# Altium PCB STM32_PCB.PcbDoc (part 2 of 3)
Units mm, origin at the board's own origin, x right, y up, seen from the top; angles counter-clockwise.
Board outline 112.45 x 84.2 mm, 4 copper layers (Top Layer, Int1 (GND), Int2 (PWR), Bottom Layer), stack 1.479 mm thick; 174 components, 200 nets, 660 pads, 398 vias.
Unrouted connection lines stored in the file: 12.
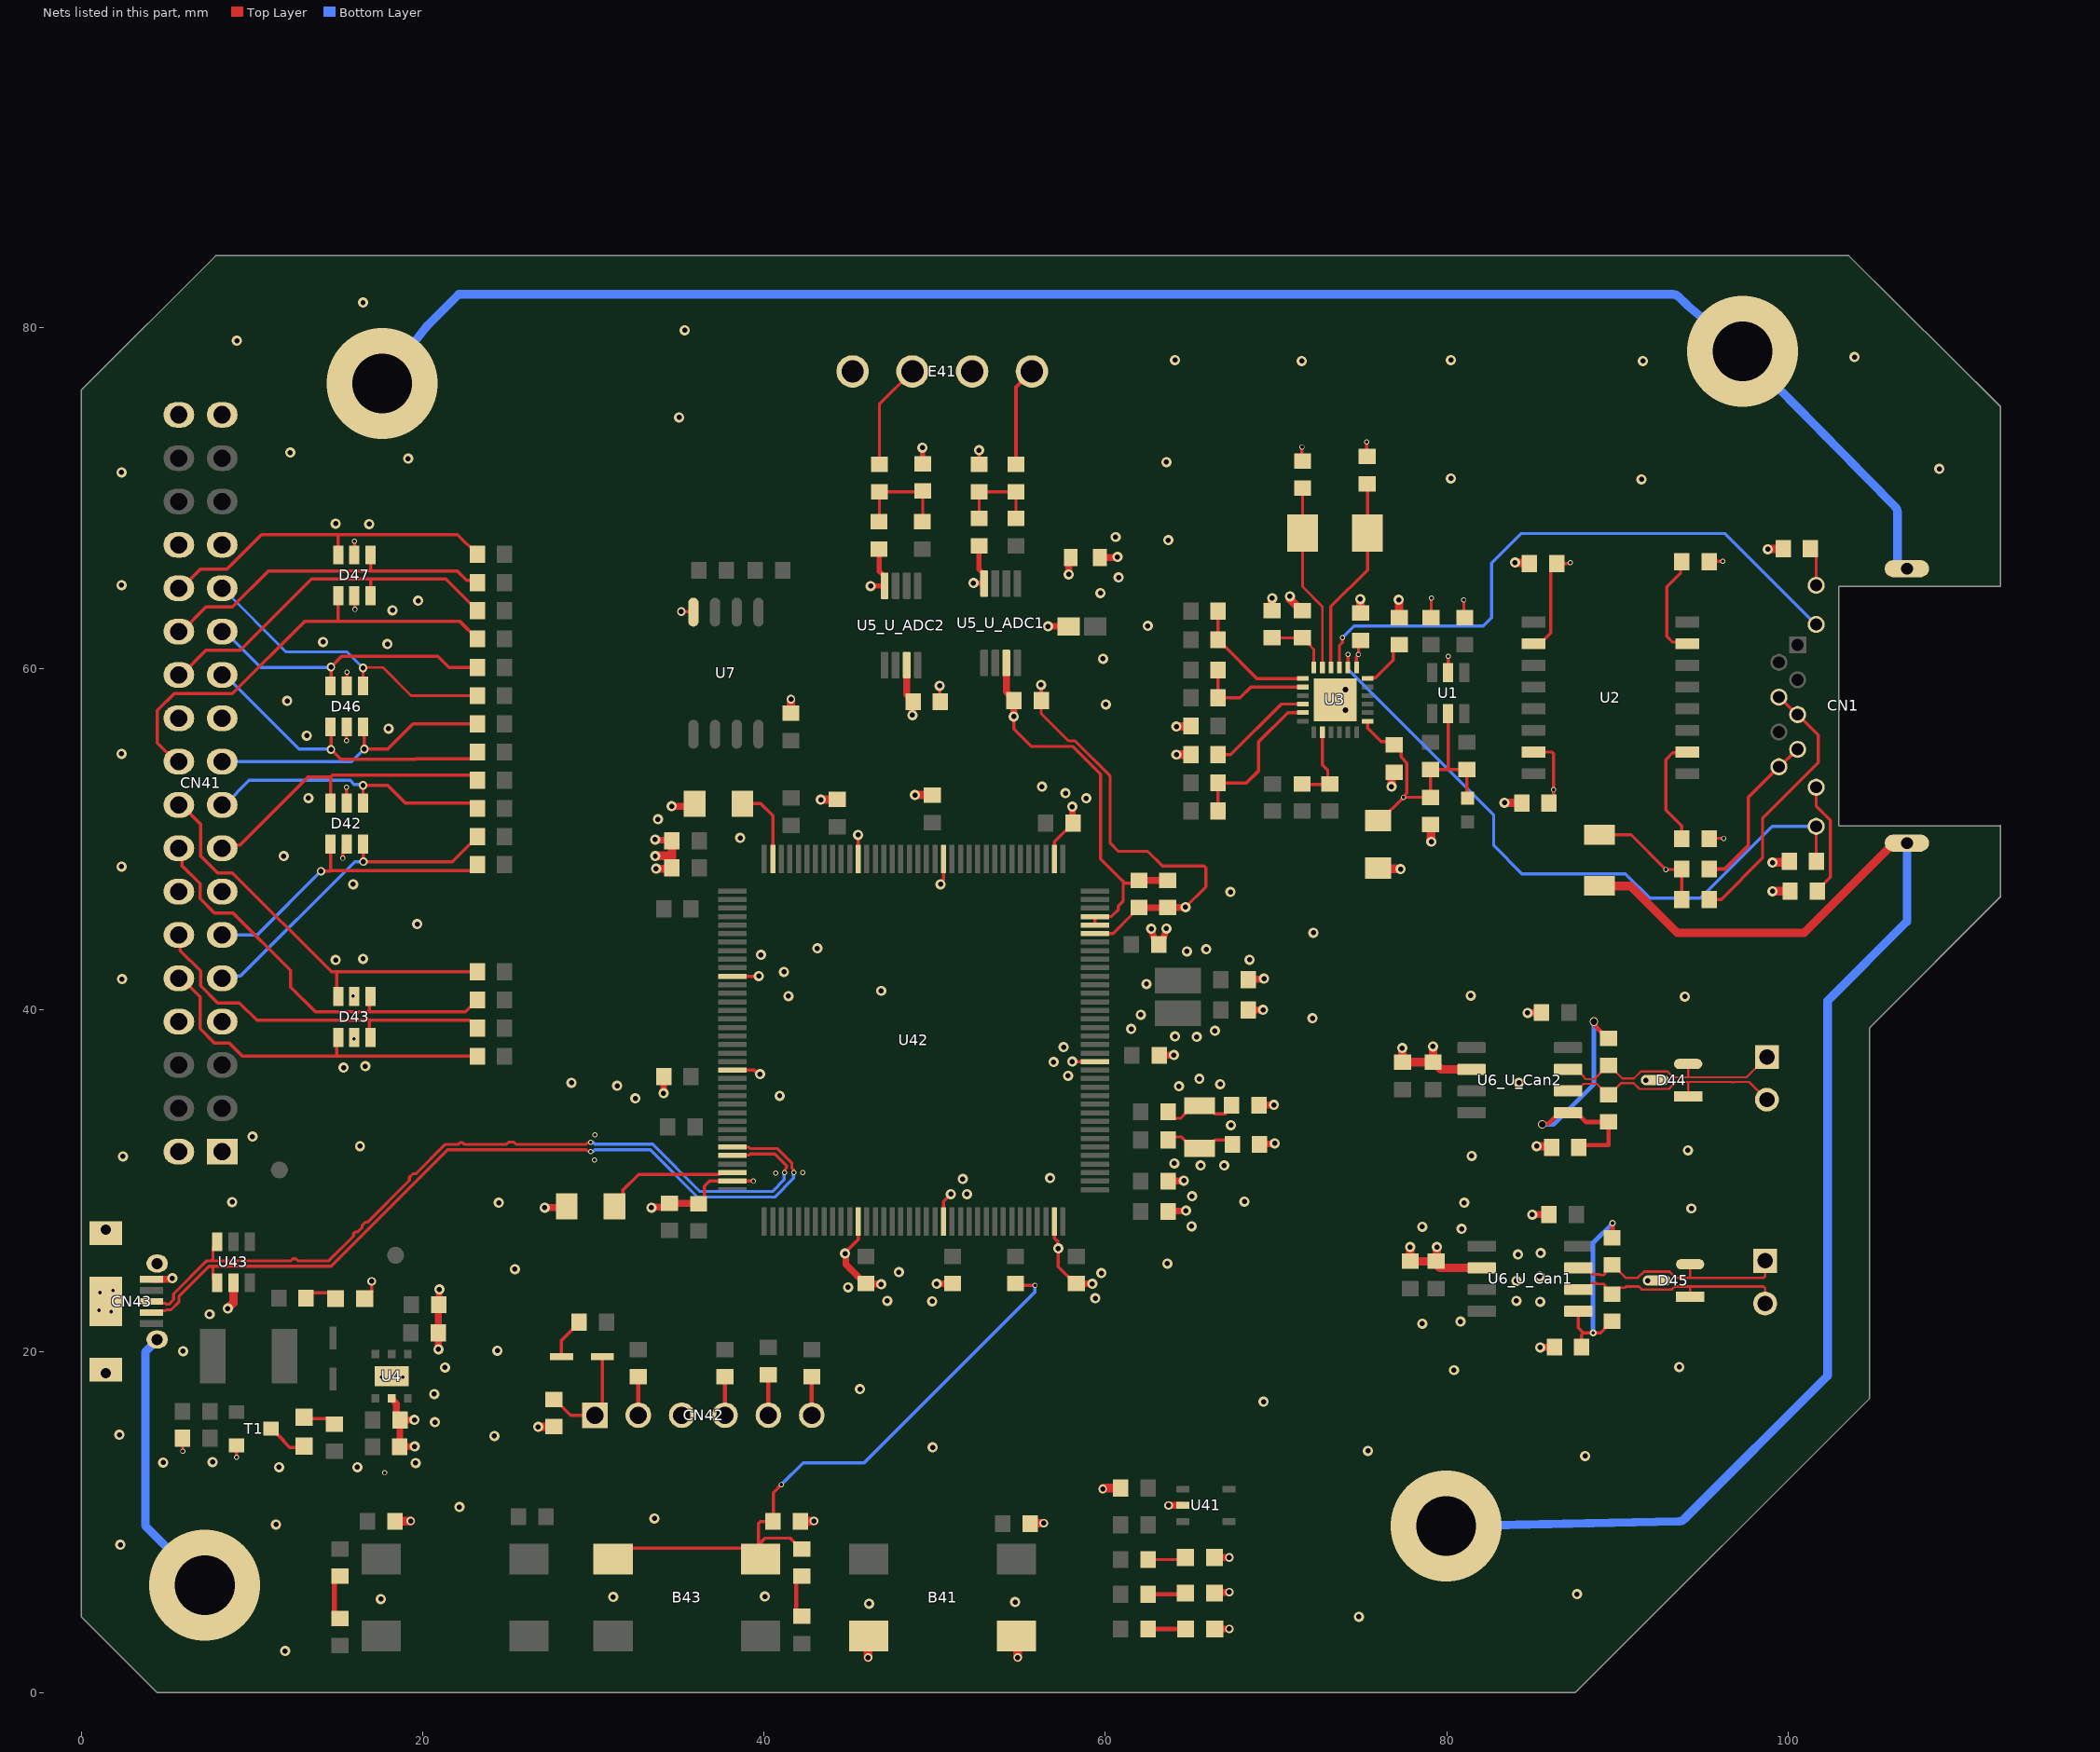
[diagram p4: the nets of this part, all layers, seen from the top]

## Part data
B41 B42 B43: library part "SW PUSHBUTTON", "SE PUSHBUTTON"
C1 C2 C3 C4 C5 C6 C10 C11 C12 C15 C16 C22: library part Capacitor_ST, "Capacitor 0402 / 0603 / 0805", Revision="July-2002: Re-released for DXP Platform."
C7: library part Capacitor_ST, "Capacitor 0402 / 0603 / 0805/ 1206", Revision="July-2002: Re-released for DXP Platform."
C8: library part Cap_10uF_POL_10%_TANA, "Polarized Capacitor,10uF,10V,10%,typeA,VISHAY", Manuf_1=VISHAY, Manuf_Part_1=293D106X9010A2TE3, ECCN_US/EU=n/a, Revision="July-2002: Re-released for DXP Platform."
C9 C13 C14 C60: library part "CAP SMD 0603  X5R 1µF 25V 10%", "0603  X5R 1µF", Rated voltage=25V, Temperature Max=+125°C, Temperature Min=-55°C, Tolerance=10%, Order code Farnell=1288202RL, Technology=X5R
C17_U_ADC1 C17_U_ADC2 C18_U_ADC1 C18_U_ADC2 C19_U_Can1 C19_U_Can2 C20_U_Can1 C20_U_Can2 C21_U_Can1 C21_U_Can2 C41 C42 C43 C44 C47 C52 C61: library part CAP, "Capacitor"
  C43 C52 C61: Published=8-Jun-2000, Publisher="Altium Limited", Revision="July-2002: Re-released for DXP Platform."
C45 C46 C48 C49 C50 C51 C56 C57 C58 C59 C62 C63 C64 C65: library part Cap, "Capacitor", Published=8-Jun-2000, Publisher="Altium Limited", Revision="July-2002: Re-released for DXP Platform."
C53 C55: library part Cap_2.2uF_X7R_10%_0805, "Capacitor,2.2uF,16V, X7R,10%,0805,YAGEO", Manuf_1=YAGEO, Manuf_Part_1=CC0805KKX7R7BB225, Order=CC0805KKX7R7BB225, Revision="July-2002: Re-released for DXP Platform."
C54 C66: library part "CAP SMD 0603  X5R 1µF 25V 10%", "0603  X5R 4.7uF", Rated voltage=25V, Temperature Max=+125°C, Temperature Min=-55°C, Tolerance=10%, Order code Farnell=1288202RL, Technology=X5R
CN1: "100 Base-TX (Fast Ethernet) SMD RJ45 single port (1x1) with LEDS Integrated Magnetics Connector", Manuf_1=HanRun, Manuf_2="Pulse Electronics Corporation", Manuf_3="K.O.D International Holding", Manuf_Part_1=HR961160C, Manuf_Part_2=J3011G21DNLT, Manuf_Part_3=RMT-119A-12F6-GY-04, Distrib="Sub Co"
CN41: "Header, 18-Pin, Dual row,male", Publisher="Altium Limited"
CN42: "Header, 6-Pin, Single row", LatestRevisionDate=17-Jul-2002, LatestRevisionNote="Re-released for DXP Platform.", Publisher="Altium Limited"
D41 D48: Manuf_1=STM, Distrib=ST, ECCN_US/EU=EAR99/NEC, Manuf_Part_1=BAT60JFILM, Order=BAT60JFILM, Provided=ST, Revision="July-2002: Re-released for DXP Platform."
D42 D43 D46 D47: "4-line ESD protection", Manuf_1=STM, Manuf_Part_1=ESDA5V3L, Distrib=ST, ECCN_US/EU=EAR99/NEC, Order=ESDA5V3L, Ordered by=STM, Provided=ST, Ref St=9179034
D44 D45: library part CMP-14436-000014-1, "TVS DIODE 24VWM 42VC TO236AB"
E41: library part CMP-1559-01732-1, "OMNIMATE Signal - series LM", Colour=Orange, Manufacturer=Weidmueller, Rated_current_min_no_of_poles_TU_20_deg_C="19 A", Rated_current_use_group_B_UL_1059="10 A", Rated_voltage_for_surge_voltage_class_pollution_degree_II_2="320 V", Rated_voltage_use_group_B_UL_1059="300 V", UL_94_flammability_rating=V-2, ComponentLink1Description="Manufacturer URL", ComponentLink1URL=http://www.weidmueller.com/, ComponentLink2Description="URL Link1", ComponentLink2URL=http://catalog.weidmueller.com/catalog/Start.do?localeId=en&ObjectID=1845040000, Contact_material=Cu-Leg, Contact_surface=tinned, Insulating_material=PA, Mounting_onto_the_PCB="Solder connection", No_of_poles=4, PackageReference=LM_3_5_90_04, Packaging=Box, PartNumber=1845040000, Pitch_inch="0,138 inch", Pitch_mm="3,5 mm", Qty="100 PCS", Revision=V1, Short_text_for_material="LM 3.50/04/90 3.2SN OR BX", Side_termination_characteristic="closed side", Solder_pin_length_mm="3,2 mm", Solid_max_H05_07_V_U="1,5 mm²", Solid_min_H05_07_V_U="0,5 mm²", Wire_cross_section_AWG_max_UL_1059="AWG 14", Wire_cross_section_AWG_min_UL_1059="AWG 28"
F41: library part CMP-2100-03653-2, "PTC RESET FUSE 15V 500MA 1812", Ambient Temperature Range High=+85°C, Ambient Temperature Range Low=-40°C, Current Rating=100A, Hold Current=0.5A, Manufacturer=Bourns, Package=1812, Resistance=0.15-1Ω, Temperature="-40°C to +85°C", Trip Current=1A, Voltage Rating=15V, Automotive=Yes, Automotive Grade="Grade 3", Category=Fuse, ComponentLink2Description=Datasheet, ComponentLink2URL=http://www.bourns.com/docs/Product-Datasheets/mfmsmf.pdf, Device Class L1="Circuit Protection", Device Class L2="PTC Resettable Fuses", Device Class L3=unset, Digikey Description="PTC RESET FUSE 15V 500MA 1812", Height=0.85mm, Lead Free=Yes, Manufacturer Part Number=MF-MSMF050-2, Mouser Description="PTC Resettable Fuse 0.5A(hold) 1A(trip) 15V 100A 0.8W 0.15s 0.15Ohm SMD Solder Pad 1812 T/R", Octopart=https://octopart.com/mf-msmf050-2-bourns-28047, RoHS=TRUE, Temperature Range High=+85°C, Temperature Range Low=-40°C, Trip Time=0.15s
FB41: library part CMP-0686-00557-7, "Chip Ferrite Bead, 0603, 120Ω @ 100MHz, 0.05Ω, 25%, 2A", Case Code (Imperial)=0603, Case Code (Metric)=1608, Current Rating=2A, DC Resistance (DCR)=50mR, Frequency=100MHz, Max Operating Temperature=125°C, Min Operating Temperature=-55°C, Package Quantity=1, Tolerance=25%, Case/Package=0603, Core Material=Ferrite, DC Current=2A, Depth=0.8mm, Height=0.8mm, Impedance=120R, Lead Free="Lead Free", Length=1.6mm, Material=Steel, Max Current Rating=2A, Max DC Current=2A, Number of Circuits=1, Number of Lines=1, Number of Pins=2, Packaging="Tape and Reel", Radiation Hardening=No, REACH SVHC="No SVHC", RoHS Compliant=Yes, Shielding=Unshielded, Termination=SMD/SMT, Test Frequency=100MHz, Width=0.8mm
J41 J42: library part CMP-17439-000026-1, "CONN HEADER VERT 2POS 2.5MM", Color=Natural, Contact Resistance=20mR, Current Rating=3A, Housing Color=White, Max Operating Temperature=85°C, Max Voltage Rating (AC)=250V, Min Operating Temperature=-25°C, Connector Type=Plug, Contact Material="Copper Alloy", Contact Mating Length=0.13inch, Contact Plating=Tin, Contact Type="Male Pin", Depth=3.8mm, Fastening Type=Detent, Gender=Male, Housing Material=Nylon, Lead Free="Lead Free", Length=7.5mm, Max Current Rating=3A, Mount="Through Hole", Number of Contacts=2, Number of Positions=2, Number of Rows=1, Orientation=Straight, Packaging=Bulk, Pitch=2.5mm, Series=EH, Termination=Press-Fit, Voltage Rating=250V
L1: library part Inductor, "Inductor", Published=8-Jun-2000, Publisher="Altium Limited", Revision="July-2002: Re-released for DXP Platform."
LD1 LD2 LD41 LD42 LD43: library part LED2, "Typical RED, GREEN, YELLOW, AMBER GaAs LED", Published=8-Jun-2000, Publisher="Altium Limited", Revision="July-2002: Re-released for DXP Platform."
R1 R2 R6 R7: library part Res_50_1%_0603, "Resistor,50,0603,1%,YAGEO", Manuf_1=YAGEO, Manuf_Part_1=RC0402FR-0750RL, Distrib=FARNELL, ECCN_US/EU=n/a
R3 R4 R5 R10 R18 R20 R21 R22 R24 R27_U_ADC1 R27_U_ADC2 R28_U_ADC1 R28_U_ADC2 R29_U_ADC1 R29_U_ADC2 R41 R42 R43 R44 R45 R46 R51 R54 R56 R57 R58 R59 R61 R62 R63 R64 R65 R67 R68 R69 R70 R73: library part Resistor_ST, "Resistor 0402 / 0603 / 0805"
R8 R9 R16 R19: library part Res_33_1%_0402, "Resistor,33,0402,1%,YAGEO", Manuf_1=YAGEO, Manuf_Part_1=RC0402FR-0733RL, Distrib=FARNELL, ECCN_US/EU=n/a
R11 R12 R13 R14: library part Res_75_1%_0603, "Resistor,75,0603,1%,YAGEO", Manuf_1=YAGEO, Manuf_Part_1=RC0402FR-0750RL, Distrib=FARNELL, ECCN_US/EU=n/a
R15: library part Res_12K1_1%_0603, "Resistor,12K1,0603,1%,VISHAY", Manuf_1=VISHAY, Manuf_Part_1="MCT 0603-50 1% P5 12K1", Distrib=FARNELL, ECCN_US/EU=n/a, Order=2325243
R17: library part Res_1K5_1%_0402, "Resistor,1K5,0402,1%,YAGEO", Manuf_1=YAGEO, Manuf_Part_1=RC0402FR-071K5L, Distrib=FARNELL, ECCN_US/EU=n/a, Order=RC0402FR-071K5L
R23 R25 R26 R47 R48 R76 R78: library part res1, "Resistor", Published=8-Jun-2000, Publisher="Altium Limited", Revision="July-2002: Re-released for DXP Platform."
R30_U_Can1 R30_U_Can2 R31_U_Can1 R31_U_Can2 R32_U_Can1 R32_U_Can2 R33 R34 R49 R50 R52 R53 R55 R60 R66 R71 R72 R74 R75 R77: library part Res1, "Resistor", Published=8-Jun-2000, Publisher="Altium Limited", Revision="July-2002: Re-released for DXP Platform."
  R30_U_Can1 R30_U_Can2 R32_U_Can1 R32_U_Can2 R55: Ordered by=Subcon
SB41: library part "Circuit Breaker", "Circuit Breaker", Published=24-Mar-1999, Publisher="Altium Limited", Revision="July-2002: Re-released for DXP Platform."
T1: library part NPN, "NPN Bipolar Transistor", Code - JEDEC=TO-226-AA, Published=8-Jun-2000, Publisher="Altium Limited", Revision="July-2002: Re-released for DXP Platform."
U3: "LAN8742A-CZ-TR - Small Footprint RMII 10/100 Ethernet, Transceiver with HP Auto-MDIX and flexPWR Technology SQFN-24", Manuf_1=MICROCHIP, Distrib=MICROCHIP, Manuf_Part_1=LAN8742A-CZ-TR, Order=LAN8742A-CZ-TR
U4: library part LD39050P
U5_U_ADC1 U5_U_ADC2: library part CMP-0272-01143-3, "High-Speed, Single-Supply, Rail-to-Rail Operational Amplifier MicroAmplifier(TM) Series, 2.7 to 5.5 V, -40 to 85 degC, 8-pin SOP (DGK8), Green (RoHS & no Sb/Br)", Manufacturer="Texas Instruments", Total Supply Voltage(Max)(+5V is 5, +/-5V is 10)=5.5, Total Supply Voltage(Min)(+5V is 5, +/-5V is 10)=2.7, CMRR(Min)(dB)=66, Code_JEDEC=MO-187, ComponentLink1Description="Manufacturer URL", ComponentLink1URL=http://www.ti.com/, ComponentLink2Description=Datasheet, ComponentLink2URL=http://www.ti.com/general/docs/lit/getliterature.tsp?genericPartNumber=OPA350&fileType=pdf, ComponentLink3Description="Package Specification", ComponentLink3URL=http://www.ti.com/litv/pdf/mpds028d, DatasheetVersion=SBOS099C, Eco-Plan="Green (RoHS & no Sb/Br)", IIB(Max)(pA)=10, Iq per channel(Max)(mA)=8.5, Mounting Technology="Surface Mount", Number of Channels=1, Offset Drift(Typ)(uV/C)=4, PackageDescription="8-Pin Thin Small Outline, Body 3 x 3 mm, Pitch 0.65 mm", PackageReference=DGK0008A, PackageVersion="4073329/E, 05/2006", PartNumber=OPA350EA/250, Slew Rate(Typ)(V/us)=22, Sub Family="Low Input Bias Current Amp (<=10pA), Low Offset Voltage Amplifier (<=500uV), Low Supply Voltage Amplifier (<=2.7V), Precision Amplifier", Vio (25C)(Max)(mV)=1, Vn at 1kHz(Typ)(nV/rtHz)=18
U6_U_Can1 U6_U_Can2: library part CMP-0315-00041-2, "Automotive Catalog 3.3 V CAN Transceiver, 17 mA, -40 to 125 degC, 8-pin SOIC (D), Green (RoHS & no Sb/Br)", Drivers Per Package=1, Manufacturer="Texas Instruments", Rating=Automotive, Supply Voltage(s)(V)=3.3, Code_JEDEC=MS-012AA, ComponentLink1Description=Datasheet, ComponentLink1URL=http://www.ti.com/general/docs/lit/getliterature.tsp?genericPartNumber=SN65HVD230Q-Q1&fileType=pdf, DatasheetVersion=SGLS398A, Eco-Plan="Green (RoHS & no Sb/Br)", ICC(Max)(mA)=17, Isolated=No, Mounting Technology="Surface Mount", PackageDescription="8-Pin Plastic Small Outline Integrated Circuit, 4.9 x 3.9 mm, Pitch 1.27 mm Pitch", PackageReference=D0008A, PackageVersion="revM, Jun-2011", PartNumber=SN65HVD230QDRG4Q1, Receivers Per Package=1, SubFamily=CAN, Transient Pulse Protection(V)="-25 to 25"
U7: library part CMP-0378-00057-1, "4 Mbit SPI Serial Flash, 2.7 to 3.6 V, 50 MHz, -40 to 85 degC, 8-pin SOIC (S2A8), Tube", Manufacturer=Microchip, ComponentLink1Description="Manufacturer URL", ComponentLink1URL=http://www.microchip.com, ComponentLink2Description=Datasheet, ComponentLink2URL=http://ww1.microchip.com/downloads/en/DeviceDoc/25051A.pdf, ComponentLink3Description="Package Specification", ComponentLink3URL=http://ww1.microchip.com/downloads/en/DeviceDoc/25051A.pdf, ComponentLink4Description="Product URL", ComponentLink4URL=http://www.microchip.com/SST25VF040B, DatasheetVersion="Rev. A", Mounting Technology="Surface Mount", PackageDescription="8-Lead Plastic Small Outline Intergrated Circuit, 5.275 x 5.275 mm Body, 1.27 mm Pitch", PackageReference=SOIC-S2A8, PackageVersion="Rev. A", PartNumber=SST25VF040B-50-4I-S2AF
X1: library part XTAL_5032, "Crystal Oscillator", LatestRevisionDate=17-Jul-2002, LatestRevisionNote="Re-released for DXP Platform.", PackageReference=R38, Published=8-Jun-2000, Publisher="Altium Limited"
X41: library part CRYSTAL_32K, "Crystal"
X42: library part XTAL, "Crystal Oscillator", LatestRevisionDate=17-Jul-2002, LatestRevisionNote="Re-released for DXP Platform.", PackageReference=R38, Published=8-Jun-2000, Publisher="Altium Limited"

## Free pads (board coordinates)
  round 1 smd: 2(11.608,30.632) 2(18.415,25.629)

## Via types
v1: diameter 0.6, hole 0.3, Top Layer to Bottom Layer, 270 vias
v2: diameter 0.3, hole 0.2, Top Layer to Bottom Layer, 77 vias
v3: diameter 0.5, hole 0.3, Top Layer to Bottom Layer, 39 vias
v4: diameter 6.5, hole 3.5, Top Layer to Bottom Layer, 4 vias
v5: diameter 0.5, hole 0.4, Top Layer to Bottom Layer, 4 vias
v6: diameter 0.4, hole 0.2, Top Layer to Bottom Layer, 2 vias
v7: diameter 0.66, hole 0.33, Top Layer to Bottom Layer, 2 vias

## Nets (pads, with @x,y where several pads share a name; then routed paths per layer and width w, separated by ;. In a path a pad name is that pad's centre, name@x,y a point inside that pad or via, vN(x,y) a via of type N, cw(c..) or ccw(c..) an arc to the next point about the centre after c; other vN are vias at no path point)
AGND: C17_U_ADC1.2 C17_U_ADC2.2 C18_U_ADC1.2 C18_U_ADC2.2 C45.2 C46.2 E41.A2 E41.A4 R29_U_ADC1.1 R29_U_ADC2.1 SB41.1 U5_U_ADC1.4 U5_U_ADC2.4 U42.31 | length 36.4
  Top Layer w0.175: C18_U_ADC1.2@56.236,58.153 56.236,57.378 57.84,55.773 58.224,55.773 60.284,53.713 60.284,49.774 60.757,49.301 62.484,49.301 63.348,48.438 65.785,48.438 65.888,48.335 65.888,47.219 v1(64.694,46.025) ; U42.31@59.393,44.477 60.446,44.477 61.556,45.587 61.556,45.637 61.919,45.999 C45.2@61.969,45.999
  Top Layer w0.2: v1(50.292,59.004) 50.292,58.102 C18_U_ADC2.2@50.33,58.064 ; R29_U_ADC1.1@52.565,71.983 52.603,72.021 v1(52.603,72.796) ; C18_U_ADC1.2@56.236,58.153 v1(56.236,59.055)
  Top Layer w0.3: v1(46.253,64.846) 47.043,64.846 U5_U_ADC2.4@47.056,64.86 47.056,65.41 46.761,65.705 46.761,66.993 C17_U_ADC2.2@46.736,67.018 ; v1(49.276,72.949) 49.276,72.034 R29_U_ADC2.1@49.301,72.009 ; v1(52.273,65.024) 52.861,65.024 U5_U_ADC1.4@52.898,64.987 52.898,65.537 52.603,65.832 C17_U_ADC1.2@52.603,67.196
  Top Layer w0.4: v1(57.861,65.532) 57.861,66.215 SB41.1@57.969,66.523 ; C45.2@62.243,45.749 61.993,45.999 C45.2@61.969,45.999 C46.2@63.652,45.999 63.665,46.012 64.681,46.012 v1(64.694,46.025)
AVDD: C18_U_ADC1.1 C18_U_ADC2.1 C45.1 C46.1 FB41.2 U5_U_ADC1.7 U5_U_ADC2.7 U42.32 U42.33 | length 26.9
  Top Layer w0.175: v1(54.635,57.201) 54.635,56.464 55.651,55.448 58.09,55.448 59.715,53.823 59.715,48.844 61.128,47.431 C45.1@61.556,47.431 ; U42.33@59.953,45.486 60.359,45.486 60.753,45.88 60.753,46.085 60.984,46.315 ccw(c60.86,46.439) 61.035,46.439 61.035,47.561
  Top Layer w0.19: U42.32@59.393,44.977 U42.33@59.393,45.477
  Top Layer w0.4: U5_U_ADC2.7@48.356,60.21 48.356,58.488 48.73,58.114 48.692,58.076 v1(48.692,57.277) ; U5_U_ADC1.7@54.198,60.337 54.198,58.64 54.648,58.191 54.642,58.184 54.642,57.207 v1(54.635,57.201) ; v1(56.642,62.484) FB41.2@57.847,62.484 ; C45.1@61.969,47.599 C46.1@63.652,47.599
BOOT0: B43.1 B43.4 C61.2 R74.2 R78.1 | length 38.6
  Top Layer w0.19: B43.4@31.159,7.831 31.794,8.466 39.174,8.466 B43.1@39.809,7.831 39.68,7.961 B43.1@39.68,8.667 ; v2(41.021,12.192) 40.551,11.722 40.551,10.058 R78.1@40.526,10.033 39.791,10.033 39.68,9.922 B43.1@39.68,8.667 ; C61.2@42.215,8.42 42.165,8.42 41.53,9.055 40.067,9.055 B43.1@39.68,8.667 ; R74.2@54.737,23.965 54.826,23.876 v2(55.88,23.876)
  Bottom Layer w0.19: v2(41.021,12.192) 42.291,13.462 45.861,13.462 55.88,23.481 v2(55.88,23.876)
CAN_U_Can1_N: D45.1 J41.2 R32_U_Can1.1 U6_U_Can1.6 | length 13.3
  Top Layer w0.15: U6_U_Can1.6@87.706,23.622 88.206,23.622 88.456,23.872 88.456,23.913 88.544,24.001 88.767,24.001 88.818,23.95 89.182,23.95 89.27,23.862 89.27,23.73 89.645,23.355 R32_U_Can1.1@89.687,23.355 90.062,23.73 90.433,23.73 90.5,23.797 91.254,23.797 91.427,23.625 93.187,23.625 93.359,23.797 98.561,23.797 98.649,23.71 J41.2@98.649,22.804 ; D45.1@94.258,23.201 94.258,23.761 94.294,23.797
CAN_U_Can1_P: D45.2 J41.1 R30_U_Can1.2 U6_U_Can1.7 | length 13.8
  Top Layer w0.15: U6_U_Can1.7@87.706,24.892 88.206,24.892 88.456,24.642 88.456,24.601 88.544,24.513 88.98,24.513 89.03,24.463 89.182,24.463 89.27,24.55 89.27,24.682 89.645,25.057 R30_U_Can1.2@89.687,25.057 ; R30_U_Can1.2@89.737,25.057 90.484,24.31 91.195,24.31 91.562,24.677 93.051,24.677 93.418,24.31 98.561,24.31 98.649,24.398 J41.1@98.649,25.304 ; D45.2@94.258,25.101 94.258,24.346 94.294,24.31
CAN_U_Can2_N: D44.1 J42.2 R32_U_Can2.1 U6_U_Can2.6 | length 13.9
  Top Layer w0.125: U6_U_Can2.6@87.102,35.255 87.602,35.255 88.025,35.678 88.796,35.678 89.434,35.039 R32_U_Can2.1@89.484,35.039 ; R32_U_Can2.1@89.534,35.039 90.205,35.71 90.957,35.71 91.291,35.376 93.013,35.376 93.421,35.785 94.107,35.785 ; D44.1@94.143,34.94 94.143,35.749 94.107,35.785 ; J42.2@98.755,34.747 97.718,35.785 96.846,35.785 96.824,35.762 96.72,35.762 96.698,35.785 94.107,35.785
CAN_U_Can2_P: D44.2 J42.1 R30_U_Can2.2 U6_U_Can2.7 | length 14.1
  Top Layer w0.125: U6_U_Can2.7@87.102,36.525 87.602,36.525 88.041,36.086 88.041,36.049 88.138,35.953 88.646,35.953 89.434,36.741 R30_U_Can2.2@89.484,36.741 ; R30_U_Can2.2@89.534,36.741 90.291,35.985 90.957,35.985 91.377,36.404 92.931,36.404 93.275,36.06 94.107,36.06 ; D44.2@94.143,36.84 94.143,36.095 94.107,36.06 ; J42.1@98.755,37.247 97.568,36.06 94.107,36.06
ConC6: CN41.10 D43.1 R70.1 | length 21.6
  Top Layer w0.19: CN41.10@5.715,41.859 5.865,41.859 6.964,40.76 6.964,38.906 7.794,38.076 8.663,38.076 9.451,37.287 14.986,37.287 ; D43.1@14.976,38.392 14.976,37.297 14.986,37.287 ; R70.1@23.203,37.287 14.986,37.287
ConD8: CN41.28 D47.6 R51.2 | length 20.4
  Top Layer w0.19: CN41.28@5.715,64.719 5.865,64.719 6.981,65.835 8.535,65.835 10.557,67.857 15.052,67.857 ; D47.6@15.052,66.675 15.052,67.857 ; R51.2@23.203,66.7 22.046,67.857 15.052,67.857
ConD9: CN41.26 D47.4 R54.2 | length 20.2
  Top Layer w0.19: CN41.26@5.715,62.179 5.865,62.179 7.306,63.62 8.86,63.62 10.975,65.735 16.942,65.735 ; D47.4@16.952,66.675 16.952,65.745 16.942,65.735 ; R54.2@23.203,65.049 23.075,65.178 22.579,65.178 22.022,65.735 16.942,65.735
ConD10: CN41.24 D47.3 R57.2 | length 21.6
  Top Layer w0.19: CN41.24@5.715,59.639 5.865,59.639 7.306,61.08 9.315,61.08 13.487,65.253 16.942,65.253 ; D47.3@16.952,64.275 16.952,65.242 16.942,65.253 ; R57.2@23.203,63.398 21.349,65.253 16.942,65.253
ConD11: CN41.20 D47.1 R58.2 | length 26.4
  Top Layer w0.19: CN41.20@5.715,54.559 5.565,54.559 4.466,55.658 4.466,57.554 5.452,58.54 8.86,58.54 13.083,62.763 15.052,62.763 ; D47.1@15.052,64.275 15.052,62.763 ; R58.2@23.203,61.747 22.187,62.763 15.052,62.763
ConD12: CN41.25 D46.3 R61.2 | length 17.2
  Top Layer w0.19: D46.3@14.63,59.236 v3(14.63,60.096) 15.255,60.721 20.889,60.721 21.539,60.071 R61.2@23.203,60.071
  Bottom Layer w0.19: CN41.25@8.255,62.179 8.405,62.179 10.513,60.071 14.605,60.071 v3(14.63,60.096)
ConD13: CN41.27 D46.1 R63.1 | length 18.4
  Top Layer w0.15: D46.1@16.505,59.275 16.51,59.281 v3(16.51,60.046) 16.535,60.071 17.678,60.071 19.329,58.42 R63.1@23.203,58.42
  Bottom Layer w0.15: CN41.27@8.255,64.719 11.989,60.985 15.57,60.985 v3(16.51,60.046)
ConD14: CN41.19 D46.6 R65.2 | length 17.1
  Top Layer w0.19: D46.6@16.586,56.552 v3(16.586,55.296) 17.958,55.296 19.431,56.769 R65.2@23.203,56.769
  Bottom Layer w0.19: CN41.19@8.255,54.559 15.85,54.559 v3(16.586,55.296)
ConD15: CN41.23 D46.4 R68.1 | length 18.3
  Top Layer w0.19: D46.4@14.58,56.358 14.63,56.307 v3(14.63,55.27) 15.204,54.697 19.585,54.697 19.601,54.713 22.848,54.713 23.203,55.068 R68.1@23.203,55.118
  Bottom Layer w0.19: CN41.23@8.255,59.639 8.405,59.639 12.748,55.296 14.605,55.296 v3(14.63,55.27)
ConG2: CN41.15 D42.3 R56.1 | length 18.4
  Top Layer w0.19: CN41.15@8.255,49.479 8.44,49.664 9.304,49.664 13.282,53.643 14.602,53.643 ; D42.3@14.602,52.127 14.602,53.643 ; R56.1@23.203,53.467 22.909,53.761 14.721,53.761 14.602,53.643
ConG3: CN41.17 D42.1 R59.1 | length 17.3
  Top Layer w0.19: D42.1@16.502,52.127 16.51,52.135 v3(16.51,53.162) 17.958,53.162 18.993,52.127 22.892,52.127 R59.1@23.203,51.816
  Bottom Layer w0.19: CN41.17@8.255,52.019 8.405,52.019 9.841,53.456 15.753,53.456 15.987,53.222 16.451,53.222 v3(16.51,53.162)
ConG4: CN41.9 D42.6 R62.2 | length 19.4
  Top Layer w0.19: D42.6@16.502,49.727 16.535,49.694 v3(16.535,48.692) 21.73,48.692 R62.2@23.203,50.165
  Bottom Layer w0.19: CN41.9@8.255,41.859 8.389,41.993 9.329,41.993 16.027,48.692 v3(16.535,48.692)
ConG5: CN41.11 D42.4 R64.2 | length 18.2
  Top Layer w0.19: v3(14.046,48.133) 14.577,48.133 14.602,48.158 ; D42.4@14.602,49.727 14.602,48.158 ; R64.2@23.203,48.514 22.848,48.158 14.602,48.158
  Bottom Layer w0.19: CN41.11@8.255,44.399 10.312,44.399 v3(14.046,48.133)
ConG6: CN41.18 D43.6 R67.1 | length 23.8
  Top Layer w0.19: CN41.18@5.715,52.019 5.865,52.019 7.006,50.878 7.006,49.024 7.992,48.038 8.86,48.038 14.658,42.24 14.961,42.24 ; D43.6@14.976,40.792 14.976,42.225 14.961,42.24 ; R67.1@22.911,42.24 14.961,42.24
ConG7: CN41.16 D43.4 R69.1 | length 24.2
  Top Layer w0.19: CN41.16@5.715,49.479 5.914,49.28 5.914,48.444 6.964,47.394 6.964,46.526 7.8,45.69 8.894,45.69 12.268,42.316 12.268,41.351 13.726,39.893 16.891,39.893 ; D43.4@16.876,40.792 16.876,39.909 16.891,39.893 ; R69.1@23.203,40.589 22.507,39.893 16.891,39.893
ConG8: CN41.12 D43.3 R73.1 | length 21.8
  Top Layer w0.19: CN41.12@5.715,44.399 5.803,44.311 5.803,43.476 6.985,42.293 6.985,41.425 7.992,40.418 9.265,40.418 10.288,39.395 16.866,39.395 ; D43.3@16.876,38.392 16.876,39.385 16.866,39.395 ; R73.1@23.203,38.938 23.203,38.988 22.848,39.343 22.789,39.343 22.737,39.395 16.866,39.395
DATA_N: CN43.2 U42.103 U43.1 | length 49.4
  Top Layer w0.17: CN43.2@4.12,22.271 4.231,22.382 4.935,22.382 4.989,22.436 5.263,22.436 5.731,22.904 5.731,23.232 7.485,24.986 7.625,24.986 ; U43.1@7.94,23.996 7.725,24.211 7.725,24.886 7.625,24.986 ; v2(29.845,31.694) 29.82,31.719 29.683,31.719 29.59,31.811 21.469,31.811 14.644,24.986 7.625,24.986 ; U42.103@38.143,31.977 38.154,31.966 39.108,31.966 39.187,31.887 40.766,31.887 41.636,31.018 41.636,30.735 41.728,30.642 41.728,30.505 v2(41.753,30.48)
  Bottom Layer w0.18: v2(29.845,31.694) 29.868,31.717 30.013,31.717 30.102,31.806 33.345,31.806 36.114,29.037 40.629,29.037 41.73,30.138 41.73,30.457 v2(41.753,30.48)
DATA_P: CN43.3 U42.104 U43.6 | length 48.8
  Top Layer w0.17: CN43.3@4.12,22.921 4.231,22.81 4.935,22.81 4.989,22.756 5.13,22.756 5.411,23.036 5.411,23.365 7.352,25.306 7.625,25.306 ; U43.6@7.94,26.296 7.725,26.081 7.725,25.406 7.625,25.306 ; v2(29.845,32.248) 29.82,32.223 29.683,32.223 29.59,32.131 25.463,32.131 25.336,32.258 25.044,32.258 24.917,32.131 22.428,32.131 22.334,32.226 22.193,32.226 22.098,32.131 21.336,32.131 19.609,30.404 19.431,30.404 19.228,30.201 19.228,30.023 16.764,27.559 16.637,27.559 16.447,27.368 16.447,27.241 16.205,27 16.053,27 15.951,26.899 15.951,26.746 14.511,25.306 12.7,25.306 12.581,25.425 12.395,25.425 12.276,25.306 7.625,25.306 ; U42.104@38.143,31.477 38.154,31.488 39.108,31.488 39.187,31.567 40.634,31.567 41.316,30.885 41.316,30.735 41.224,30.642 41.224,30.505 v2(41.199,30.48)
  Bottom Layer w0.18: v2(29.845,32.248) 29.868,32.225 30.013,32.225 30.102,32.136 33.482,32.136 36.251,29.367 40.492,29.367 41.185,30.06 41.185,30.466 v2(41.199,30.48)
GND: B41.1 B41.4 C1.1 C2.2 C3.1 C4.1 C5.1 C6.1 C7.1 C8.2 C9.2 C10.1 C11.1 C12.2 C13.2 C14.2 C15.1 C16.1 C19_U_Can1.2 C19_U_Can2.2 C20_U_Can1.1 C20_U_Can2.1 C21_U_Can1.1 C21_U_Can2.1 C22.1 C41.2 C42.2 C43.1 C44.2 C47.2 C48.2 C49.2 C50.2 C51.2 C53.2 C54.2 C55.2 C56.2 C57.2 C58.2 C59.2 C60.2 C62.2 C63.2 C64.2 C65.2 C66.2 CN1.13 CN1.14 CN41.1 CN41.2 CN41.7 CN41.8 CN41.13 CN41.14 CN41.21 CN41.22 CN41.29 CN41.30 CN41.35 CN41.36 CN42.3 CN43.5 CN43.6 CN43.7 CN43.8 CN43.9 CN43.10 D42.2 D42.5 D43.2 D43.5 D44.3 D45.3 D46.2 D46.5 D47.2 D47.5 LD2.2 LD41.2 LD42.2 LD43.2 R10.2 R15.2 R20.2 R21.2 R22.2 R26.1 R31_U_Can1.2 R31_U_Can2.2 R41.2 R47.2 R76.2 R78.2 SB41.2 T1.2 U1.2 U3.25 U4.0 U4.2 U6_U_Can1.2 U6_U_Can2.2 U7.4 U41.2 U42.16 U42.38 U42.51 U42.61 U42.83 U42.94 U42.107 U42.120 U42.130 U42.143 U43.2 | length 312.8
  Top Layer w0.19: R26.1@5.931,14.91 5.944,14.897 v2(5.944,14.148) ; v2(9.093,13.792) 9.093,14.473 T1.2@9.109,14.489 ; v2(15.316,48.895) 15.316,49.161 15.347,49.191 15.347,49.522 D42.5@15.552,49.727 ; v2(15.545,53.061) 15.545,52.134 D42.2@15.552,52.127 ; v2(15.545,55.778) 15.545,56.578 D46.5@15.552,56.585 ; D46.2@15.552,58.985 15.57,59.003 v2(15.57,59.792) ; D43.2@15.926,38.392 15.926,38.354 v2(15.977,38.303) ; D43.5@15.926,40.792 v2(15.926,40.818) ; D47.2@16.002,64.275 16.027,64.25 v2(16.027,63.475) ; D47.5@16.002,66.675 v2(16.002,67.462) ; LD2.2@16.598,23.089 17.003,23.494 17.003,24.09 v3(17.018,24.105) ; v2(17.602,18.491) v2(18.847,18.491) ; v3(35.154,63.348) 35.833,63.348 U7.4@35.865,63.316 ; C55.2@35.789,51.943 C55.2@35.941,52.095 ; C56.2@36.17,28.651 36.512,28.994 36.512,29.68 36.809,29.977 U42.107@38.143,29.977 U42.107@38.143,29.977 39.366,29.976 v2(39.37,29.972) ; U42.94@38.143,36.477 39.418,36.477 39.658,36.238 v1(39.768,36.238) ; U42.83@38.143,41.977 38.144,41.978 39.692,41.978 v1(39.7,41.986) ; v1(44.755,25.73) 44.755,25.789 45.329,26.364 45.338,26.364 45.518,26.544 U42.120@45.518,27.602 ; U42.130@50.518,27.602 50.518,28.776 v1(50.952,29.21) ; U42.143@57.018,27.602 U42.143@57.018,27.602 57.019,26.632 57.204,26.448 57.204,26.072 v1(57.239,26.036) 57.239,24.969 58.243,23.965 C48.2@58.293,23.965 ; U42.38@57.018,48.852 57.018,49.868 57.697,50.547 57.747,50.547 58.102,50.902 C65.2@58.102,50.952 ; v1(58.064,36.982) 58.067,36.98 59.39,36.98 U42.16@59.393,36.977 ; v2(71.526,73) 71.526,72.199 C12.2@71.552,72.174 ; v2(75.311,73.279) 75.311,72.453 C2.2@75.336,72.428 ; U1.2@80.086,59.772 v2(80.086,60.731)
  Top Layer w0.2: v1(45.517,50.267) 45.517,49.577 U42.61@45.518,48.852 ; v1(50.343,47.371) 50.343,47.479 50.518,47.654 U42.51@50.518,48.852
  Top Layer w0.4: CN43.5@4.12,24.221 5.218,24.221 5.28,24.282 v1(5.334,24.282) ; U4.2@18.186,17.242 18.211,17.217 18.211,17.192 18.466,16.938 18.466,16.192 C15.1@18.682,15.977 v1(19.525,15.977) ; C13.2@18.659,14.402 18.672,14.415 19.516,14.415 v1(19.528,14.428) ; C13.2@18.67,14.413 18.67,15.907 C15.1@18.74,15.977 ; v1(20.93,20.117) 20.919,20.127 20.919,21.064 C16.1@20.909,21.075 20.922,21.087 20.922,22.726 C14.2@20.934,22.738 20.957,22.761 20.957,23.599 v1(20.98,23.622) ; v1(27.153,28.423) 28.372,28.423 C53.2@28.448,28.499 ; v1(33.401,28.423) 33.439,28.461 34.247,28.461 C51.2@34.463,28.677 34.476,28.664 36.157,28.664 C56.2@36.17,28.651 ; v1(33.626,49.992) 33.664,49.954 C62.2@34.566,49.954 ; v1(34.112,35.128) 34.119,35.135 34.119,36.087 C57.2@34.125,36.093 ; v1(34.595,51.943) C55.2@35.789,51.943 ; v1(44.755,25.73) 44.793,25.692 44.793,25.096 45.924,23.965 C50.2@45.974,23.965 45.993,23.946 46.844,23.946 v1(46.863,23.927) ; v1(50.114,23.952) 50.121,23.959 51.048,23.959 C49.2@51.054,23.965 ; v1(58.064,51.918) 58.064,51.252 C65.2@58.102,50.952 ; C48.2@58.293,23.965 58.299,23.959 59.226,23.959 v1(59.233,23.952) ; SB41.2@59.684,66.523 60.706,66.523 v1(60.706,66.548) ; v1(62.687,44.755) 62.882,44.14 C66.2@63.132,43.84 63.382,44.14 v1(63.576,44.78) ; C59.2@63.157,37.338 63.17,37.351 63.995,37.351 v1(64.008,37.363) ; C58.2@63.665,28.194 63.69,28.219 64.694,28.219 v1(64.719,28.245) ; C60.2@63.665,29.972 63.678,29.985 64.579,29.985 v1(64.592,29.997) ; v3(63.703,10.973) U41.2@64.538,10.973 ; LD43.2@66.394,5.832 66.436,5.874 67.24,5.874 v3(67.259,5.893) ; LD41.2@66.396,7.925 v3(67.259,7.925) ; LD42.2@66.402,3.734 v3(67.259,3.734) ; C44.2@68.364,40.005 v1(69.24,40.005) ; C47.2@68.364,41.783 68.389,41.808 69.266,41.808 v1(69.291,41.834) ; C41.2@68.999,34.417 69.012,34.43 69.863,34.43 v1(69.875,34.442) ; C42.2@69.037,32.131 69.062,32.156 69.901,32.156 v1(69.926,32.182) ; v1(84.734,39.827) 84.747,39.84 85.547,39.84 R31_U_Can2.2@85.56,39.853 ; v1(85.014,28.016) R31_U_Can1.2@85.992,28.016 ; v1(85.474,20.229) 85.487,20.241 86.287,20.241 C19_U_Can1.2@86.3,20.254 ; v1(91.779,24.151) D45.3@92.307,24.151
  Top Layer w0.5: v1(8.585,22.504) 8.585,22.513 8.915,22.843 U43.2@8.915,24.022 ; v1(26.772,15.57) 26.778,15.577 27.68,15.577 R41.2@27.686,15.583 ; v1(33.63,49.022) 33.649,49.041 34.521,49.041 34.606,49.126 ; v1(33.68,48.285) 34.323,48.261 ccw(c34.34,48.761) 34.34,48.261 34.408,48.261 C54.2@34.608,48.336 34.606,48.338 34.606,49.126 ; C62.2@34.566,49.954 34.606,49.915 34.606,49.126 ; C22.1@41.58,57.391 v3(41.58,58.217) ; v1(43.332,52.324) C63.2@44.298,52.337 ; v1(48.844,52.603) 49.61,52.603 C64.2@49.86,52.591 ; v1(64.16,56.617) 64.98,56.617 C4.1@65.005,56.642 ; v1(64.16,54.966) R10.2@65.004,54.965 ; C3.1@69.774,63.411 69.748,63.436 69.748,64.11 v1(69.774,64.135) ; v1(70.815,64.237) 70.834,64.217 70.834,64.059 71.483,63.411 C9.2@71.533,63.411 ; v1(74.93,64.084) 74.943,64.072 74.943,63.271 C10.1@74.955,63.259 ; C8.2@75.971,48.311 76.003,48.279 77.273,48.279 v1(77.292,48.26) ; v1(76.759,53.086) 76.778,53.105 76.778,53.804 C5.1@76.911,53.937 ; v1(77.191,64.033) 77.203,64.021 77.203,63.017 R15.2@77.216,63.005 ; v1(77.394,37.77) 77.406,37.757 77.406,36.957 C21_U_Can2.1@77.419,36.944 C20_U_Can2.1@78.702,36.944 ; v1(77.851,26.111) 77.854,26.108 77.854,25.283 C21_U_Can1.1@77.857,25.28 C20_U_Can1.1@79.381,25.28 ; C6.1@79.045,50.864 79.076,50.832 79.076,49.879 v1(79.096,49.86) ; C20_U_Can2.1@79.197,36.944 v1(79.197,37.871) ; C20_U_Can2.1@79.247,36.944 79.666,36.525 U6_U_Can2.2@81.452,36.525 ; v1(79.426,26.111) 79.426,25.07 79.604,24.892 U6_U_Can1.2@82.056,24.892 ; v1(83.388,52.146) 83.401,52.133 84.379,52.133 C11.1@84.392,52.121 ; v1(83.998,66.218) 84.017,66.199 84.817,66.199 C1.1@84.849,66.167 ; v1(85.268,32.029) 85.287,32.01 86.087,32.01 C19_U_Can2.2@86.144,31.953 ; C7.1@88.951,47.268 90.756,47.268 93.497,44.526 100.939,44.526 106.195,49.782 CN1.14@106.959,49.782 ; v1(91.664,35.89) D44.3@92.192,35.89 ; v1(98.806,67.005) 98.819,67.018 99.695,67.018 R20.2@99.708,67.031 ; v1(99.085,46.965) R22.2@100.114,46.965 ; v1(99.085,48.641) 99.105,48.66 99.863,48.66 99.92,48.717 R21.2@100.063,48.717
  Top Layer w0.508: R76.2@18.377,10.033 18.402,10.058 v3(19.304,10.058) ; R78.2@42.126,10.033 42.151,10.058 v3(42.926,10.058) ; v3(46.101,2.057) 46.101,3.288 B41.1@46.145,3.331 ; B41.4@54.795,3.331 54.864,3.262 v3(54.864,2.057) ; C43.1@55.588,9.906 55.613,9.931 v3(56.388,9.931) ; v3(59.842,11.938) 59.893,11.989 R47.2@60.897,11.989
  Bottom Layer w0.5: CN43.10@4.445,20.696 4.445,20.647 3.753,19.955 3.753,9.785 v4(7.239,6.299) ; v4(17.628,76.708) 20.224,80.036 cw(c20.619,79.728) 20.265,80.082 22.123,81.94 93.227,81.94 cw(c93.227,81.44) 93.573,81.802 94.064,81.33 94.065,81.329 ccw(c94.41,81.691) 94.089,81.308 v4(97.333,78.588) 97.35,78.57 106.266,69.496 cw(c105.909,69.145) 106.409,69.149 106.409,69.147 106.409,66.093 106.64,65.862 CN1.13@106.959,65.862 ; v4(79.959,9.754) 93.576,10.029 ccw(c93.566,10.529) 93.919,10.175 102.311,18.567 102.311,40.538 106.959,45.187 CN1.14@106.959,49.782
  other v1: 11.938,2.438 74.854,4.445 46.152,5.207 54.712,5.309 17.551,5.486 31.166,5.613 40.056,5.639 87.63,5.766 2.286,8.661 11.405,9.855 33.579,10.211 22.149,10.871 11.582,13.208 16.18,13.208 19.583,13.462 4.801,13.487 7.696,13.513 88.113,13.868 75.387,14.173 49.886,14.376 24.206,15.037 2.235,15.113 20.726,15.85 69.266,17.043 20.676,17.501 45.618,17.78 80.416,18.898 21.311,19.05 93.624,19.075 5.969,20.015 24.384,20.041 78.562,21.615 80.797,21.742 7.518,22.174 85.471,22.911 49.86,22.936 47.219,22.962 84.074,22.962 59.411,23.114 44.933,23.749 84.074,24.13 85.446,24.384 59.766,24.587 47.904,24.638 25.4,24.816 63.627,25.146 84.176,25.679 85.496,25.756 80.874,27.178 78.562,27.305 65.049,27.33 94.336,28.372 24.46,28.702 81.026,28.702 8.839,28.753 68.148,28.778 65.075,29.083 51.892,29.21 51.638,30.099 56.769,30.15 65.583,30.886 66.954,30.886 64.033,31.013 2.438,31.42 81.458,31.445 94.132,31.775 16.332,32.029 10.033,32.588 67.361,33.249 32.461,34.823 40.919,34.976 64.313,35.535 31.394,35.56 66.726,35.662 28.727,35.738 84.226,35.738 65.507,35.966 57.81,36.144 15.367,36.627 16.637,36.703 56.972,36.957 57.556,37.821 65.354,38.43 64.084,38.456 66.421,38.786 61.519,38.887 72.136,39.522 62.078,39.726 93.955,40.792 41.427,40.818 81.407,40.843 46.863,41.123 62.408,41.529 2.388,41.808 41.173,42.24 14.91,42.926 68.453,42.951 16.51,43.002 39.827,43.231 64.77,43.434 65.913,43.561 43.129,43.612 72.187,44.526 19.685,45.034 67.335,46.914 15.926,47.371 2.362,48.412 11.862,49.022 38.608,50.089 33.782,51.181 58.877,52.4 13.31,52.426 57.658,52.705 56.286,53.086 2.362,55.016 13.208,56.083 18.009,56.49 60.02,57.912 12.065,58.115 59.868,60.579 17.932,61.443 14.173,61.57 62.484,62.509 18.237,63.424 19.736,63.983 59.715,64.44 2.362,64.897 60.782,65.354 63.678,67.539 60.604,67.716 16.866,68.478 14.91,68.504 91.415,71.095 80.239,71.145 2.362,71.501 108.864,71.704 63.576,72.111 19.152,72.314 12.243,72.669 35.027,74.727 71.501,78.029 91.491,78.029 64.084,78.08 80.239,78.08 103.886,78.257 9.119,79.223 35.357,79.832 16.51,81.458
  other v2: 17.78,12.878 1.753,22.327 1.041,22.403 1.092,23.444 1.854,23.571 40.691,30.455 42.266,30.48 30.074,31.217 30.099,32.69
  other v7: 74.062,57.578 74.062,58.778
In_ADC1: E41.A1 R27_U_ADC1.2 | length 5.8
  Top Layer w0.2: R27_U_ADC1.2@54.762,71.971 54.762,76.491 E41.A1@55.694,77.423
In_ADC2: E41.A3 R27_U_ADC2.2 | length 6.3
  Top Layer w0.18: R27_U_ADC2.2@46.761,71.971 46.761,75.49 E41.A3@48.694,77.423
NetC1_2: C1.2 C5.2 C6.2 C8.1 C10.2 C11.2 L1.1 R1.2 R2.2 R6.2 R7.2 U1.5 U2.2 U2.7 U3.1 U3.19 | length 33.1
  Top Layer w0.18: U3.1@74.712,60.078 74.712,60.684 74.828,60.801 v2(74.828,60.833) 74.828,61.532 C10.2@74.955,61.659 75.305,61.309 C10.2@75.315,61.299 ; U3.19@75.362,56.928 75.362,56.515 76.154,55.723 C5.2@76.776,55.723 ; C8.1@75.971,51.105 76.098,51.105 v2(77.457,52.464) ; C5.2@76.911,55.537 76.961,55.537 77.321,55.177 77.321,54.816 77.651,54.486 77.651,52.69 77.457,52.496 v2(77.457,52.464) ; R7.2@79.07,63.005 79.096,63.03 v2(79.096,64.135) ; U1.5@80.086,57.372 80.086,54.178 80.175,54.089 ; v2(81.001,64.033) 81.001,63.055 R6.2@81.051,63.005 ; L1.1@81.229,52.413 81.178,52.464 R1.2@81.178,54.089 80.175,54.089 ; U2.7@85.076,55.118 86.153,55.118 86.258,55.013 86.258,52.388 C11.2@85.934,52.064 ; U2.2@85.076,61.468 85.456,61.468 86.089,62.101 86.089,65.807 C1.2@86.449,66.167 87.166,66.167 87.217,66.218 v2(87.249,66.218) ; v2(77.457,52.464) C6.2@79.045,52.464 R2.2@79.045,54.089 80.175,54.089
  other v2: 86.258,52.908
NetC2_1: C2.1 U3.4 X1.2 | length 11.7
  Top Layer w0.18: U3.4@73.212,60.078 73.212,63.636 75.357,65.781 X1.2@75.357,67.945 75.362,67.95 75.362,70.803 C2.1@75.336,70.828
NetC3_2: C3.2 C9.1 U3.6 | length 3.8
  Top Layer w0.15: C3.2@69.774,61.811 C9.1@71.533,61.811 ; C9.1@71.583,61.811 71.958,61.436 71.958,61.386 72.212,61.132 U3.6@72.212,60.078
NetC7_2: C7.2 R11.1 R12.1 R13.1 R14.1 | length 9.1
  Top Layer w0.18: C7.2@88.951,50.268 90.804,50.268 v2(92.837,48.235) 93.739,48.235 R14.1@93.764,48.26 R13.1@93.764,46.482 ; R11.1@95.364,50.038 95.39,50.063 v2(96.215,50.063) ; R12.1@95.364,66.269 95.39,66.294 v2(96.164,66.294)
NetC12_1: C12.1 U3.5 X1.1 | length 11
  Top Layer w0.15: C12.1@71.552,70.574 71.552,67.95 X1.1@71.557,67.945 71.557,64.802 72.712,63.647 U3.5@72.712,60.078
NetC17_U_ADC1_1: C17_U_ADC1.1 R27_U_ADC1.1 R28_U_ADC1.1 R29_U_ADC1.2 | length 5.3
  Top Layer w0.18: C17_U_ADC1.1@52.603,68.796 R29_U_ADC1.2@52.603,70.371 R27_U_ADC1.1@54.762,70.371 R28_U_ADC1.1@54.762,68.796
NetC17_U_ADC2_1: C17_U_ADC2.1 R27_U_ADC2.1 R28_U_ADC2.1 R29_U_ADC2.2 | length 6.1
  Top Layer w0.18: C17_U_ADC2.1@46.736,68.618 46.761,68.643 R27_U_ADC2.1@46.761,70.371 49.263,70.371 R29_U_ADC2.2@49.301,70.409 49.301,68.643 R28_U_ADC2.1@49.276,68.618
NetC19_U_Can1_1: C19_U_Can1.1 R30_U_Can1.1 R32_U_Can1.2 U6_U_Can1.5 | length 12
  Top Layer w0.19: U6_U_Can1.5@87.706,22.352 87.706,21.387 88.011,21.082 ; C19_U_Can1.1@87.9,20.254 87.9,20.971 88.011,21.082 ; R32_U_Can1.2@89.687,21.755 89.637,21.755 89.282,21.4 89.282,21.35 89.014,21.082 88.011,21.082
  Top Layer w0.26: R30_U_Can1.1@89.687,26.657 89.713,26.683 v6(89.713,27.508)
  Bottom Layer w0.26: v6(88.57,21.082) 88.57,26.365 v6(89.713,27.508)
NetC19_U_Can2_1: C19_U_Can2.1 R30_U_Can2.1 R32_U_Can2.2 U6_U_Can2.5 | length 16.6
  Top Layer w0.26: v5(85.595,33.297) 85.641,33.343 85.96,33.343 86.602,33.985 87.602,33.985 88.148,33.439 R32_U_Can2.2@89.484,33.439 89.484,32.08 87.871,32.08 C19_U_Can2.1@87.744,31.953 ; v5(88.621,39.319) 88.667,39.273 88.667,39.109 89.434,38.341 R30_U_Can2.1@89.484,38.341
  Bottom Layer w0.26: v5(85.595,33.297) 86.256,33.297 88.621,35.662 v5(88.621,39.319)
NetC41_1: C41.1 R71.1 X41.1 | length 4.7
  Top Layer w0.18: R71.1@63.665,34.036 63.665,34.015 64.025,33.655 64.415,33.655 64.722,33.962 64.722,33.987 64.757,34.022 65.157,34.022 X41.1@65.532,34.397 65.932,34.397 66.413,33.915 67.039,33.915 67.039,34.057 C41.1@67.399,34.417
NetC42_1: C42.1 R72.1 X41.2 | length 4.5
  Top Layer w0.18: R72.1@63.665,32.385 63.748,32.302 63.987,32.541 64.071,32.541 64.092,32.562 64.466,32.562 64.721,32.307 65.122,32.307 X41.2@65.532,31.897 65.932,31.897 66.42,32.385 67.183,32.385 C42.1@67.437,32.131
NetC52_1: C52.1 R75.2 | length 2.8
  Top Layer w0.3: R75.2@15.164,4.356 15.134,4.356 14.834,4.656 14.834,6.52 15.134,6.82 C52.1@15.164,6.82
NetC53_1: C53.1 U42.106 | length 8
  Top Layer w0.19: C53.1@31.242,28.499 31.72,28.977 31.72,29.434 32.658,30.372 37.363,30.372 37.413,30.422 38.088,30.422 U42.106@38.143,30.477
NetC55_1: C55.1 U42.71 | length 4.6
  Top Layer w0.19: C55.1@38.735,52.095 39.802,52.095 40.518,51.379 U42.71@40.518,48.852
NetC61_1: C61.1 R77.2 | length 2.6
  Top Layer w0.254: R77.2@42.215,4.483 42.208,4.483 41.885,4.806 41.885,6.497 42.208,6.82 C61.1@42.215,6.82
NetCN1_4: CN1.4 CN1.5 R13.2 | length 15.9
  Top Layer w0.18: R13.2@95.364,46.482 96.088,46.482 98.501,48.895 98.501,51.232 101.763,54.494 101.763,56.109 CN1.5@100.559,57.312 100.519,57.312 99.499,58.332 CN1.4@99.459,58.332
NetCN1_7: CN1.7 CN1.8 R14.2 | length 9.8
  Top Layer w0.2: R14.2@95.364,48.26 96.291,48.26 97.663,49.632 97.663,52.456 CN1.8@99.459,54.252 99.499,54.252 100.519,55.272 CN1.7@100.559,55.272
NetCN1_9: CN1.9 R20.1 | length 2.3
  Top Layer w0.175: R20.1@101.308,67.031 101.639,66.699 CN1.9@101.639,64.882
NetCN1_10: CN1.10 U3.3 | length 36.2
  Top Layer w0.18: U3.3@73.712,60.078 73.712,61.367 73.889,61.544 v2(73.889,61.824)
  Bottom Layer w0.18: v2(73.889,61.824) 74.574,62.509 82.144,62.509 82.626,62.992 82.626,66.192 84.353,67.92 96.312,67.92 CN1.10@101.639,62.592
NetCN1_11: CN1.11 R22.1 | length 6.8
  Top Layer w0.175: CN1.11@101.639,53.052 101.639,51.952 102.481,51.111 102.481,47.781 101.714,47.015 R22.1@101.714,46.965
NetCN1_12: CN1.12 R21.1 U3.2 | length 39.4
  Top Layer w0.18: U3.2@74.212,60.078 74.215,60.082 74.215,60.829 v2(74.219,60.833) ; CN1.12@101.639,50.762 101.639,48.741 R21.1@101.663,48.717
  Bottom Layer w0.18: v2(74.219,60.833) 74.232,60.819 74.232,59.93 82.753,51.41 82.753,49.632 84.404,47.981 90.475,47.981 91.897,46.558 94.869,46.558 99.073,50.762 CN1.12@101.639,50.762
NetCN42_1: CN42.1 D41.1 R41.1 | length 6.4
  Top Layer w0.18: R41.1@27.686,17.183 27.736,17.183 28.663,16.256 CN42.1@30.099,16.256 30.537,16.694 D41.1@30.537,19.685
NetCN42_2: CN42.2 R43.1 | length 2.2
  Top Layer w0.254: CN42.2@32.639,16.256 R43.1@32.639,18.504
NetCN42_4: CN42.4 R44.1 | length 2.2
  Top Layer w0.254: CN42.4@37.719,16.256 R44.1@37.719,18.504
NetCN42_5: CN42.5 R45.1 | length 2.4
  Top Layer w0.254: CN42.5@40.259,16.256 R45.1@40.259,18.631
NetCN42_6: CN42.6 R46.1 | length 2.2
  Top Layer w0.254: CN42.6@42.799,16.256 R46.1@42.799,18.504
NetD41_2: D41.2 R42.1 | length 2.5
  Top Layer w0.19: D41.2@28.137,19.685 28.137,20.632 29.172,21.667 R42.1@29.172,21.717
NetLD1_1: LD1.1 R23.1 | length 1.9
  Top Layer w0.19: LD1.1@13.056,16.141 13.132,16.065 14.504,16.065 R23.1@14.834,15.735
NetLD1_2: LD1.2 T1.3 | length 2.5
  Top Layer w0.19: T1.3@11.109,15.469 11.159,15.469 11.842,14.786 11.842,14.742 12.22,14.365 12.979,14.365 LD1.2@13.056,14.441
NetLD2_1: LD2.1 R24.1 | length 2
  Top Layer w0.19: R24.1@13.17,23.114 13.475,23.419 14.568,23.419 LD2.1@14.898,23.089
NetLD41_1: LD41.1 R49.2 | length 2.3
  Top Layer w0.18: R49.2@62.497,7.798 64.569,7.798 LD41.1@64.696,7.925
NetLD42_1: LD42.1 R50.1 | length 2.2
  Top Layer w0.254: R50.1@62.497,3.734 LD42.1@64.702,3.734
NetLD43_1: LD43.1 R53.2 | length 2.2
  Top Layer w0.254: R53.2@62.497,5.766 64.628,5.766 LD43.1@64.694,5.832
NetR3_2: R3.2 R8.1 U3.8 | length 6.8
  Top Layer w0.18: R8.1@66.605,58.293 R3.2@66.605,59.917
  Top Layer w0.19: R8.1@66.605,58.293 67.889,58.293 68.524,58.928 U3.8@71.562,58.928
NetR4_2: R4.2 R9.1 U3.7 | length 7.6
  Top Layer w0.18: R9.1@66.605,61.695 R4.2@66.605,63.373
  Top Layer w0.19: R9.1@66.605,61.695 66.605,61.645 66.96,61.29 67.01,61.29 68.872,59.428 U3.7@71.562,59.428
NetR5_2: R5.2 R16.1 U3.11 | length 9.3
  Top Layer w0.18: R5.2@66.605,51.712 R16.1@66.605,53.313
  Top Layer w0.19: R16.1@66.605,53.313 68.274,53.313 68.986,54.026 68.986,55.723 70.691,57.428 U3.11@71.562,57.428
NetR10_1: R10.1 U3.10 | length 6.2
  Top Layer w0.19: R10.1@66.605,54.964 67.34,54.964 70.304,57.928 U3.10@71.562,57.928
NetR11_2: R11.2 U2.10 | length 6.5
  Top Layer w0.175: R11.2@93.764,50.038 93.764,50.787 92.837,51.714 92.837,54.674 93.236,55.072 94.05,55.072 U2.10@94.096,55.118
NetR12_2: R12.2 U2.15 | length 6.1
  Top Layer w0.175: R12.2@93.764,66.269 93.701,66.205 93.701,65.609 92.888,64.795 92.888,61.9 93.236,61.552 94.012,61.552 U2.15@94.096,61.468
NetR15_1: R15.1 U3.24 | length 3
  Top Layer w0.18: U3.24@75.362,59.428 75.403,59.47 75.827,59.47 76.86,60.503 76.86,61.049 R15.1@77.216,61.405
NetR18_2: R18.2 R19.1 U3.14 | length 4.8
  Top Layer w0.18: R18.2@71.526,53.251 71.553,53.224 72.965,53.224 73.034,53.293 73.034,54.047 72.712,54.369 U3.14@72.712,56.278 ; R19.1@73.034,53.224 73.125,53.224 R19.1@73.152,53.251